# EAGLE board macroKeyboard (EAGLE 9.6.2)
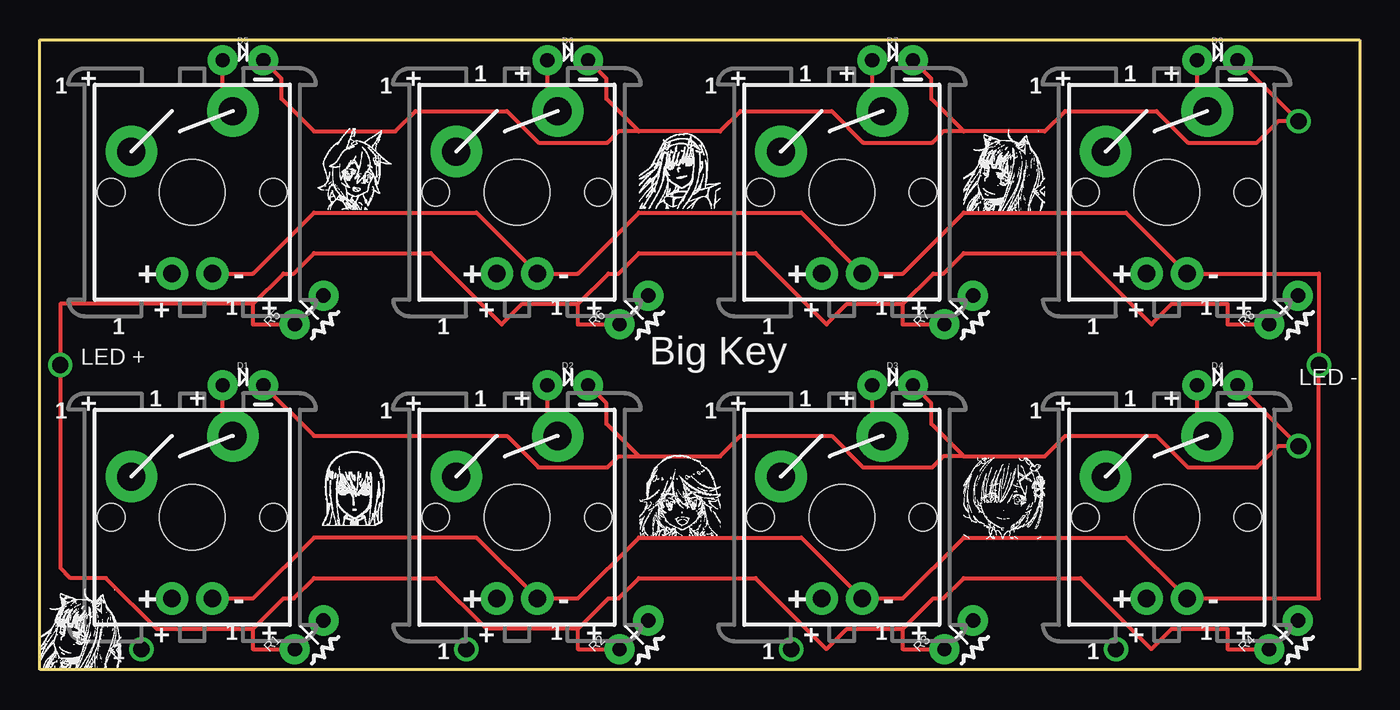
[diagram p0: board, top side]
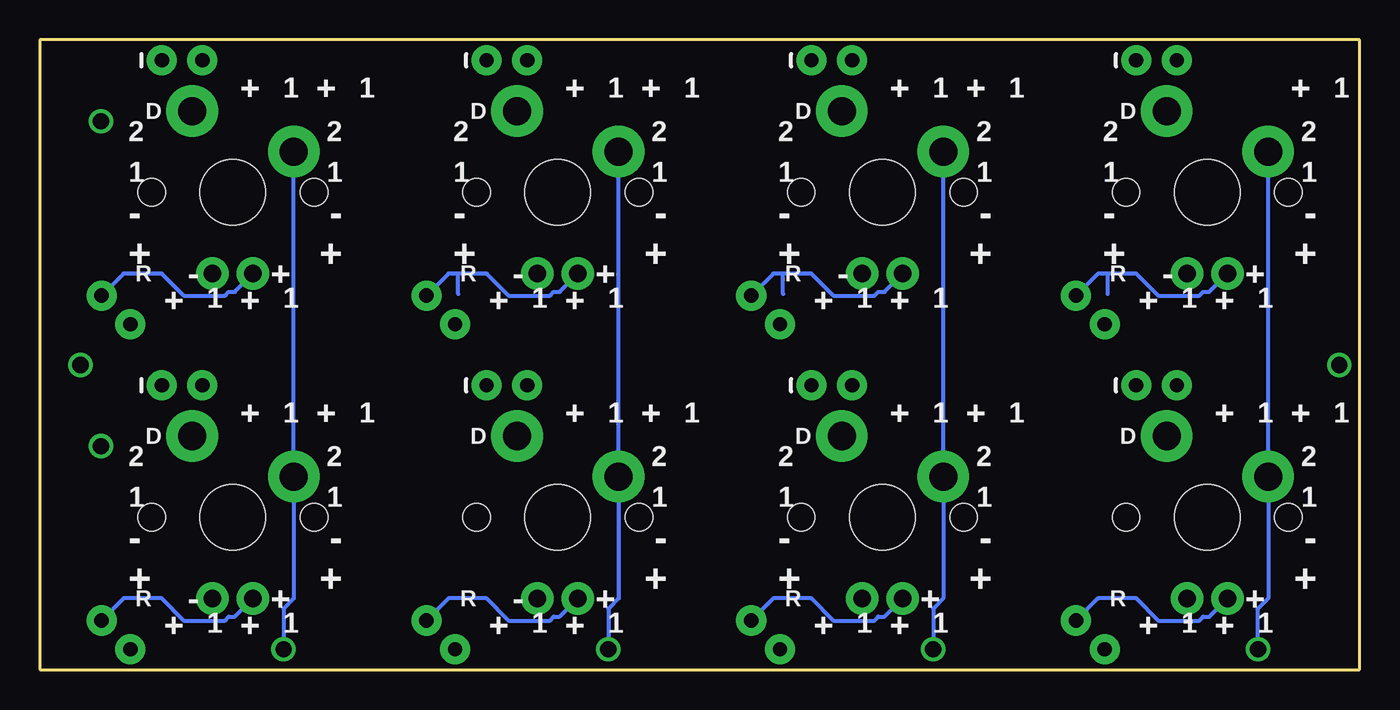
[diagram p1: board, bottom side, seen from below]

Size 82.55 x 39.37 mm. Coordinates in mm from the lower left corner, seen from the top.
Outline: 0,0 0,39.37 82.55,39.37 82.55,0 0,0
Copper layers (1*16): Top 0.035mm / dielectric 1.5mm / Bottom 0.035mm
Design rules "SparkFun-2-layer-STANDARD": minimum track width 10mil, minimum drill 20mil, track to track 10mil, track to pad 8mil, pad to pad 8mil, via to via 10mil, smd to smd 8mil, copper to edge 8mil, drill to drill 8mil, minimum pad ring 10mil, minimum via ring 10mil, stop-mask expansion 4mil, vias tented up to drill 20mil, thermal gap 10mil

## Footprints (pad centres in the part's own frame; a part is rotated, then mirrored left to right if it is on the bottom)
DIODE-PTH-0.1 = drill 0.9 pad 1.88: A -1.27,0; C 1.27,0
AXIAL-0.1 = drill 0.9 pad 1.88: P$1 0,0; P$2 2.54,0
CHERRY-MX-LED = drill 1.092 pad 2.032: A -1.27,-5.08; K 1.27,-5.08 | drill 1.753 pad 3.226: S1 -3.81,2.54; S2 2.54,5.08 | hole 4.089: 0,0 | hole 1.707: -5.08,0; 5.08,0

## Placement (x,y rotation side)
D1  DNP  [DIODE-PTH-0.1]  12.7,17.78 0 top
D2  DNP  [DIODE-PTH-0.1]  33.02,17.78 0 top
D3  DNP  [DIODE-PTH-0.1]  53.34,17.78 0 top
D4  DNP  [DIODE-PTH-0.1]  73.66,17.78 0 top
D5  DNP  [DIODE-PTH-0.1]  12.7,38.1 0 top
D6  DNP  [DIODE-PTH-0.1]  33.02,38.1 0 top
D7  DNP  [DIODE-PTH-0.1]  53.34,38.1 0 top
D8  DNP  [DIODE-PTH-0.1]  73.66,38.1 0 top
R1  DNP  [AXIAL-0.1]  15.94,1.27 45 top
R2  DNP  [AXIAL-0.1]  36.26,1.27 45 top
R3  DNP  [AXIAL-0.1]  56.58,1.27 45 top
R4  DNP  [AXIAL-0.1]  76.9,1.27 45 top
R5  DNP  [AXIAL-0.1]  15.94,21.59 45 top
R6  DNP  [AXIAL-0.1]  36.26,21.59 45 top
R7  DNP  [AXIAL-0.1]  56.58,21.59 45 top
R8  DNP  [AXIAL-0.1]  76.9,21.59 45 top
S1  CHERRY-MX-LED  [CHERRY-MX-LED]  9.53,9.53 0 top
S2  CHERRY-MX-LED  [CHERRY-MX-LED]  29.84,9.53 0 top
S3  CHERRY-MX-LED  [CHERRY-MX-LED]  50.16,9.53 0 top
S4  CHERRY-MX-LED  [CHERRY-MX-LED]  70.48,9.53 0 top
S5  CHERRY-MX-LED  [CHERRY-MX-LED]  9.53,29.84 0 top
S6  CHERRY-MX-LED  [CHERRY-MX-LED]  29.84,29.84 0 top
S7  CHERRY-MX-LED  [CHERRY-MX-LED]  50.16,29.84 0 top
S8  CHERRY-MX-LED  [CHERRY-MX-LED]  70.48,29.84 0 top

## Library data of the parts
D1-D8 S1-S8 = cherry-temp
R1-R8 = SparkFun-Resistors

## Nets
LEDA: R1.P$1 R2.P$1 R3.P$1 R4.P$1 R5.P$1 R6.P$1 R7.P$1 R8.P$1
LEDC: S1.K S2.K S3.K S4.K S5.K S6.K S7.K S8.K
N$1: R1.P$2 S1.A
N$2: R2.P$2 S2.A
N$3: D1.A S1.S2
N$4: D2.A S2.S2
N$5: R3.P$2 S3.A
N$6: D3.A S3.S2
N$7: R4.P$2 S4.A
N$8: D4.A S4.S2
N$9: R5.P$2 S5.A
N$10: D5.A S5.S2
N$11: R6.P$2 S6.A
N$12: D6.A S6.S2
N$13: R7.P$2 S7.A
N$14: D7.A S7.S2
N$15: R8.P$2 S8.A
N$16: D8.A S8.S2
SWITCH1: S1.S1 S5.S1
SWITCH2: D1.C D2.C D3.C D4.C
SWITCH4: S2.S1 S6.S1
SWITCH6: S3.S1 S7.S1
SWITCH8: S4.S1 S8.S1
SWITCH9: D5.C D6.C D7.C D8.C

## Tracks (layer width: path | path; a pad name or v marks a point on that pad's centre or on a via)
LEDA  (via drill 1.02)
  Top 0.254: 13.34,2.54 7.3,2.54 4.13,5.71 1.91,5.71 1.27,6.35 v1.27,19.05 1.27,22.86 13.34,22.86 | 13.34,2.54 13.34,1.27 R1.P$1 | 13.34,2.54 15.24,4.45 15.88,4.45 17.14,5.71 24.77,5.71 27.94,2.54 33.66,2.54 | 33.66,2.54 33.66,1.27 R2.P$1 | 33.66,2.54 35.56,4.45 36.2,4.45 37.47,5.71 44.77,5.71 49.21,1.27 50.48,2.54 53.98,2.54 | 53.98,2.54 53.98,1.27 R3.P$1 | 53.98,2.54 55.88,4.45 56.52,4.45 57.78,5.71 65.09,5.71 69.53,1.27 70.8,2.54 74.3,2.54 74.3,1.27 R4.P$1 | 13.34,22.86 13.34,21.59 R5.P$1 | 13.34,22.86 15.24,24.77 15.88,24.77 17.14,26.04 24.45,26.04 28.89,21.59 30.16,22.86 33.66,22.86 | 33.66,22.86 33.66,21.59 R6.P$1 | 33.66,22.86 35.56,24.77 36.2,24.77 37.47,26.04 44.77,26.04 49.21,21.59 50.48,22.86 53.98,22.86 | 53.98,22.86 53.98,21.59 R7.P$1 | 53.98,22.86 55.88,24.77 56.52,24.77 57.78,26.04 65.09,26.04 69.53,21.59 70.8,22.86 74.3,22.86 74.3,21.59 R8.P$1
LEDC  (via drill 1.02)
  Top 0.254: S1.K 13.34,4.45 17.14,8.26 27.3,8.26 S2.K 33.66,4.45 37.47,8.26 47.62,8.26 S3.K 53.98,4.45 57.78,8.26 67.94,8.26 S4.K 80.01,4.45 v80.01,19.05 80.01,24.77 S8.K 67.94,28.57 57.78,28.57 53.98,24.77 S7.K 47.62,28.57 37.47,28.57 33.66,24.77 S6.K 27.3,28.57 17.14,28.57 13.34,24.77 S5.K
N$1
  Bottom 0.254: S1.A 9.4,3.3 9.78,3.3 10.02,3.07 12.59,3.07 13.97,4.45 16.36,4.45 R1.P$2
N$2
  Bottom 0.254: S2.A 29.72,3.3 30.1,3.3 30.34,3.07 32.91,3.07 34.29,4.45 36.68,4.45 R2.P$2
N$3
  Top 0.254: S1.S2 11.43,15.24 D1.A
N$4
  Top 0.254: S2.S2 31.75,15.24 D2.A
N$5
  Bottom 0.254: S3.A 50.04,3.3 50.42,3.3 50.66,3.07 53.23,3.07 54.61,4.45 57,4.45 R3.P$2
N$6
  Top 0.254: S3.S2 52.07,15.24 D3.A
N$7
  Bottom 0.254: S4.A 70.36,3.3 70.74,3.3 70.97,3.07 73.55,3.07 74.93,4.45 77.32,4.45 R4.P$2
N$8
  Top 0.254: S4.S2 72.39,15.24 D4.A
N$9
  Bottom 0.254: S5.A 9.4,23.62 9.78,23.62 10.02,23.39 12.59,23.39 13.97,24.77 15.75,24.77 | 15.75,24.77 16.36,24.77 R5.P$2 | 15.75,23.5 15.75,24.77
N$10
  Top 0.254: S5.S2 11.43,35.56 D5.A
N$11
  Bottom 0.254: S6.A 29.72,23.62 30.1,23.62 30.34,23.39 32.91,23.39 34.29,24.77 36.07,24.77 | 36.07,24.77 36.68,24.77 R6.P$2 | 36.07,23.5 36.07,24.77
N$12
  Top 0.254: S6.S2 31.75,35.56 D6.A
N$13
  Bottom 0.254: S7.A 50.04,23.62 50.42,23.62 50.66,23.39 53.23,23.39 54.61,24.77 56.39,24.77 | 56.39,24.77 57,24.77 R7.P$2 | 56.39,23.5 56.39,24.77
N$14
  Top 0.254: S7.S2 52.07,35.56 D7.A
N$15
  Bottom 0.254: S8.A 70.36,23.62 70.74,23.62 70.97,23.39 73.55,23.39 74.93,24.77 77.32,24.77 R8.P$2
N$16
  Top 0.254: S8.S2 72.39,35.56 D8.A
SWITCH1  (via drill 1.02)
  Bottom 0.254: v6.35,1.27 6.35,3.81 5.71,4.45 S1.S1 S5.S1
SWITCH2  (via drill 1.02)
  Top 0.254: D1.C 17.14,14.61 29.21,14.61 31.18,12.64 35.5,12.64 36.2,13.34 37.47,13.34 | D2.C 35.43,16.64 35.43,15.37 37.47,13.34 | 57.78,13.34 56.52,13.34 55.82,12.64 51.5,12.64 49.53,14.61 43.81,14.61 42.55,13.34 37.47,13.34 | D3.C 55.75,16.64 55.75,15.37 57.78,13.34 | D4.C v78.74,13.97 77.47,13.97 76.14,12.64 71.82,12.64 69.85,14.61 64.14,14.61 62.87,13.34 57.78,13.34
SWITCH4  (via drill 1.02)
  Bottom 0.254: S6.S1 S2.S1 26.04,4.45 26.67,3.81 v26.67,1.27
SWITCH6  (via drill 1.02)
  Bottom 0.254: S7.S1 S3.S1 46.35,4.45 46.99,3.81 v46.99,1.27
SWITCH8  (via drill 1.02)
  Bottom 0.254: S8.S1 S4.S1 66.67,4.45 67.31,3.81 v67.31,1.27
SWITCH9  (via drill 1.02)
  Top 0.254: D5.C 15.11,36.96 15.11,35.69 17.14,33.66 22.23,33.66 23.5,34.92 29.21,34.92 31.18,32.96 35.5,32.96 36.2,33.66 37.47,33.66 | D6.C 35.43,36.96 35.43,35.69 37.47,33.66 | 57.78,33.66 56.52,33.66 55.82,32.96 51.5,32.96 49.53,34.92 43.81,34.92 42.55,33.66 37.47,33.66 | D7.C 55.75,36.96 55.75,35.69 57.78,33.66 | 57.78,33.66 62.87,33.66 64.14,34.92 69.85,34.92 71.82,32.96 76.14,32.96 77.47,34.29 v78.74,34.29 D8.C

## Text on the board
tPlace: + | + | 1 | + | + | 1 | + | + | 1 | + | 1 | 1 | 1 | 1 | + | 1 | + | + | 1 | + | + | 1 | + | + | 1 | + | 1 | 1 | 1 | 1 | LED + | Big Key | + | + | + | + | LED - | 1 | + | 1 | 1 | + | 1 | 1 | + | 1 | 1 | + | 1 | + | 1 | + | + | 1 | + | + | 1 | + | + | 1 | + | 1 | 1 | 1 | 1 | C:/Users/Nick/Desktop/macro/bmps/91JO0vKDrLL._AC_SL1500_.bmp
bPlace: 1 | + | 1 | + | 1 | + | 1 | + | 1 | + | 1 | + | 1 | + | D | D | D | D | 2 | 2 | 2 | 2 | 2 | 2 | 2 | 2 | 1 | 1 | 1 | 1 | 1 | 1 | 1 | 1 | - | - | - | - | - | - | - | - | + | + | + | + | + | + | + | + | + | - | - | + | - | + | - | R | R | R | R | 1 | 1 | 1 | 1 | 1 | 1 | 1 | 1 | + | + | + | + | + | + | + | + | 1 | + | 1 | + | 1 | + | 1 | + | 1 | + | 1 | + | 1 | + | 1 | + | D | D | D | D | 2 | 2 | 2 | 2 | 2 | 2 | 1 | 1 | 1 | 1 | 1 | 1 | - | - | - | - | - | - | + | + | + | + | + | + | + | R | + | R | + | - | R | + | - | R | - | 1 | + | 1 | + | 1 | + | 1 | + | 1 | + | 1 | + | 1 | + | 1 | +
Measures: Units in inches